# Allegro board QUADCOPTER1brd3_3.brd
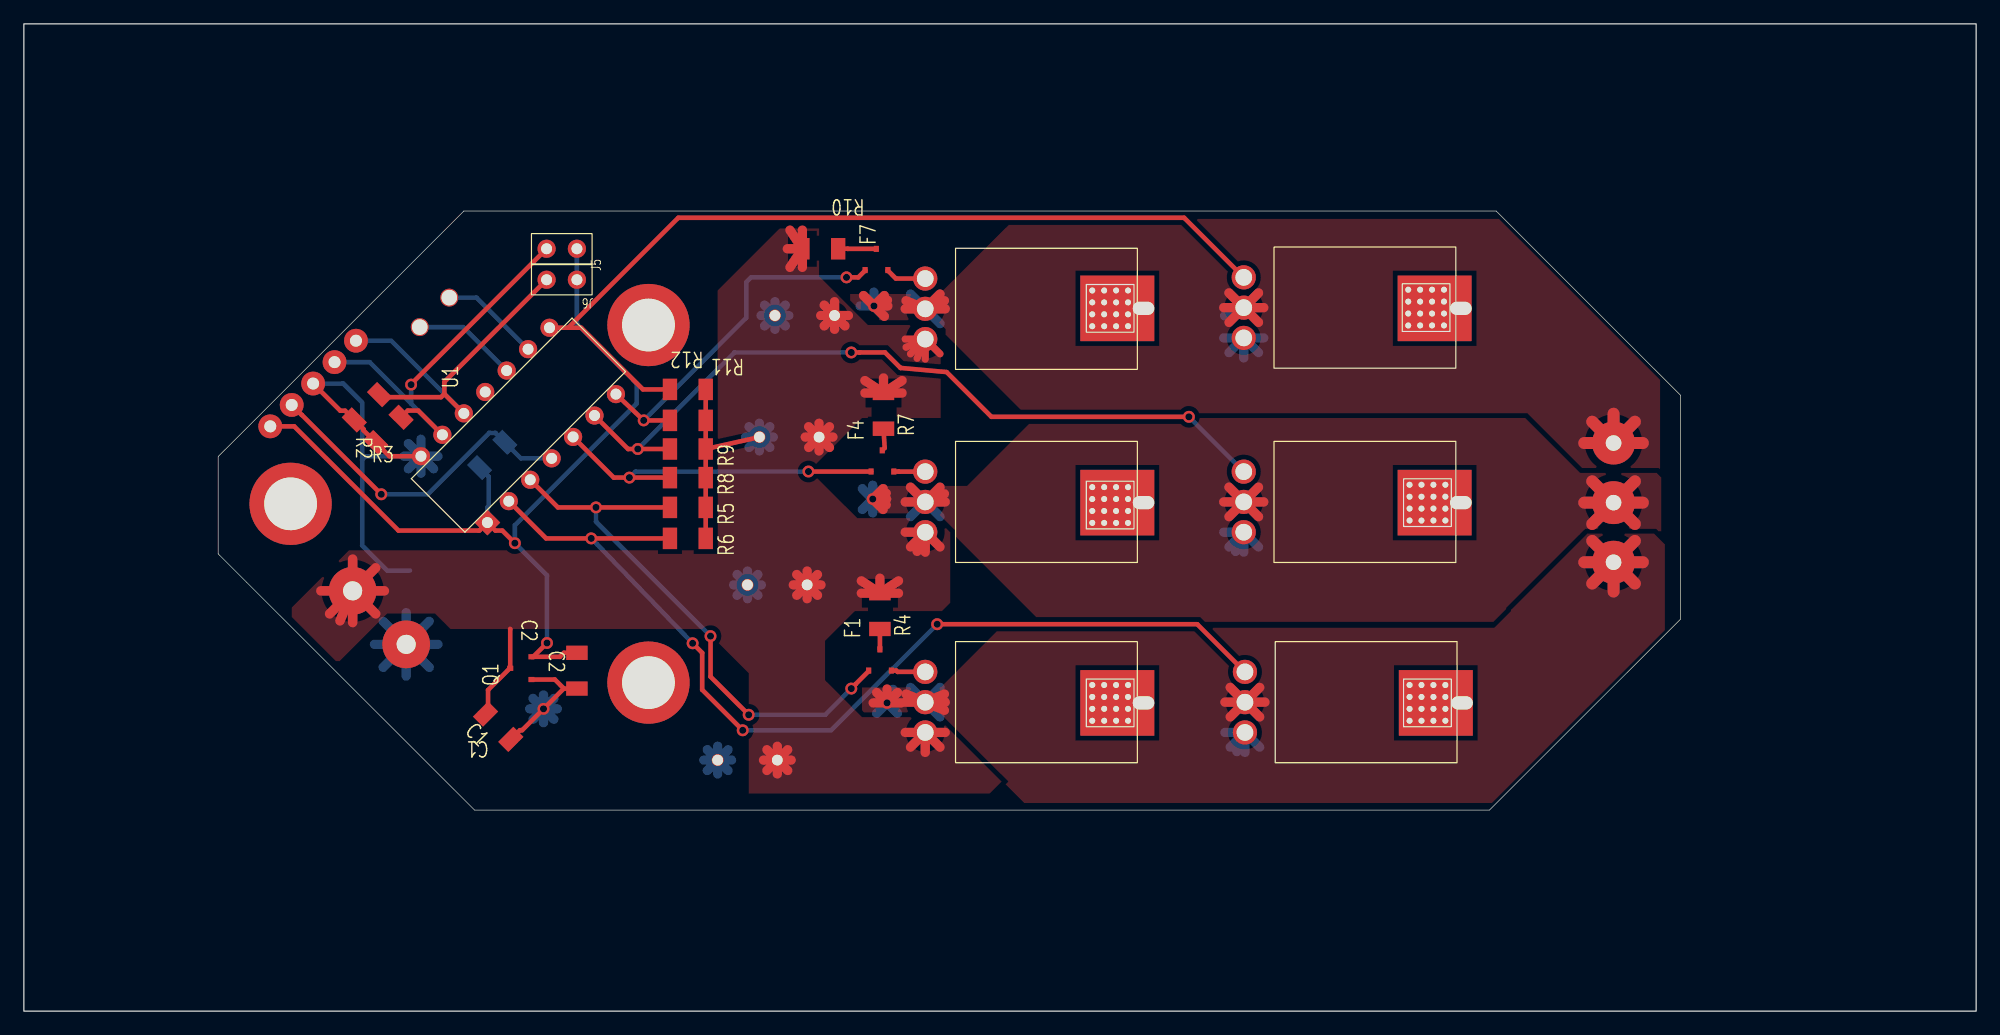
[diagram p0: board, top side]
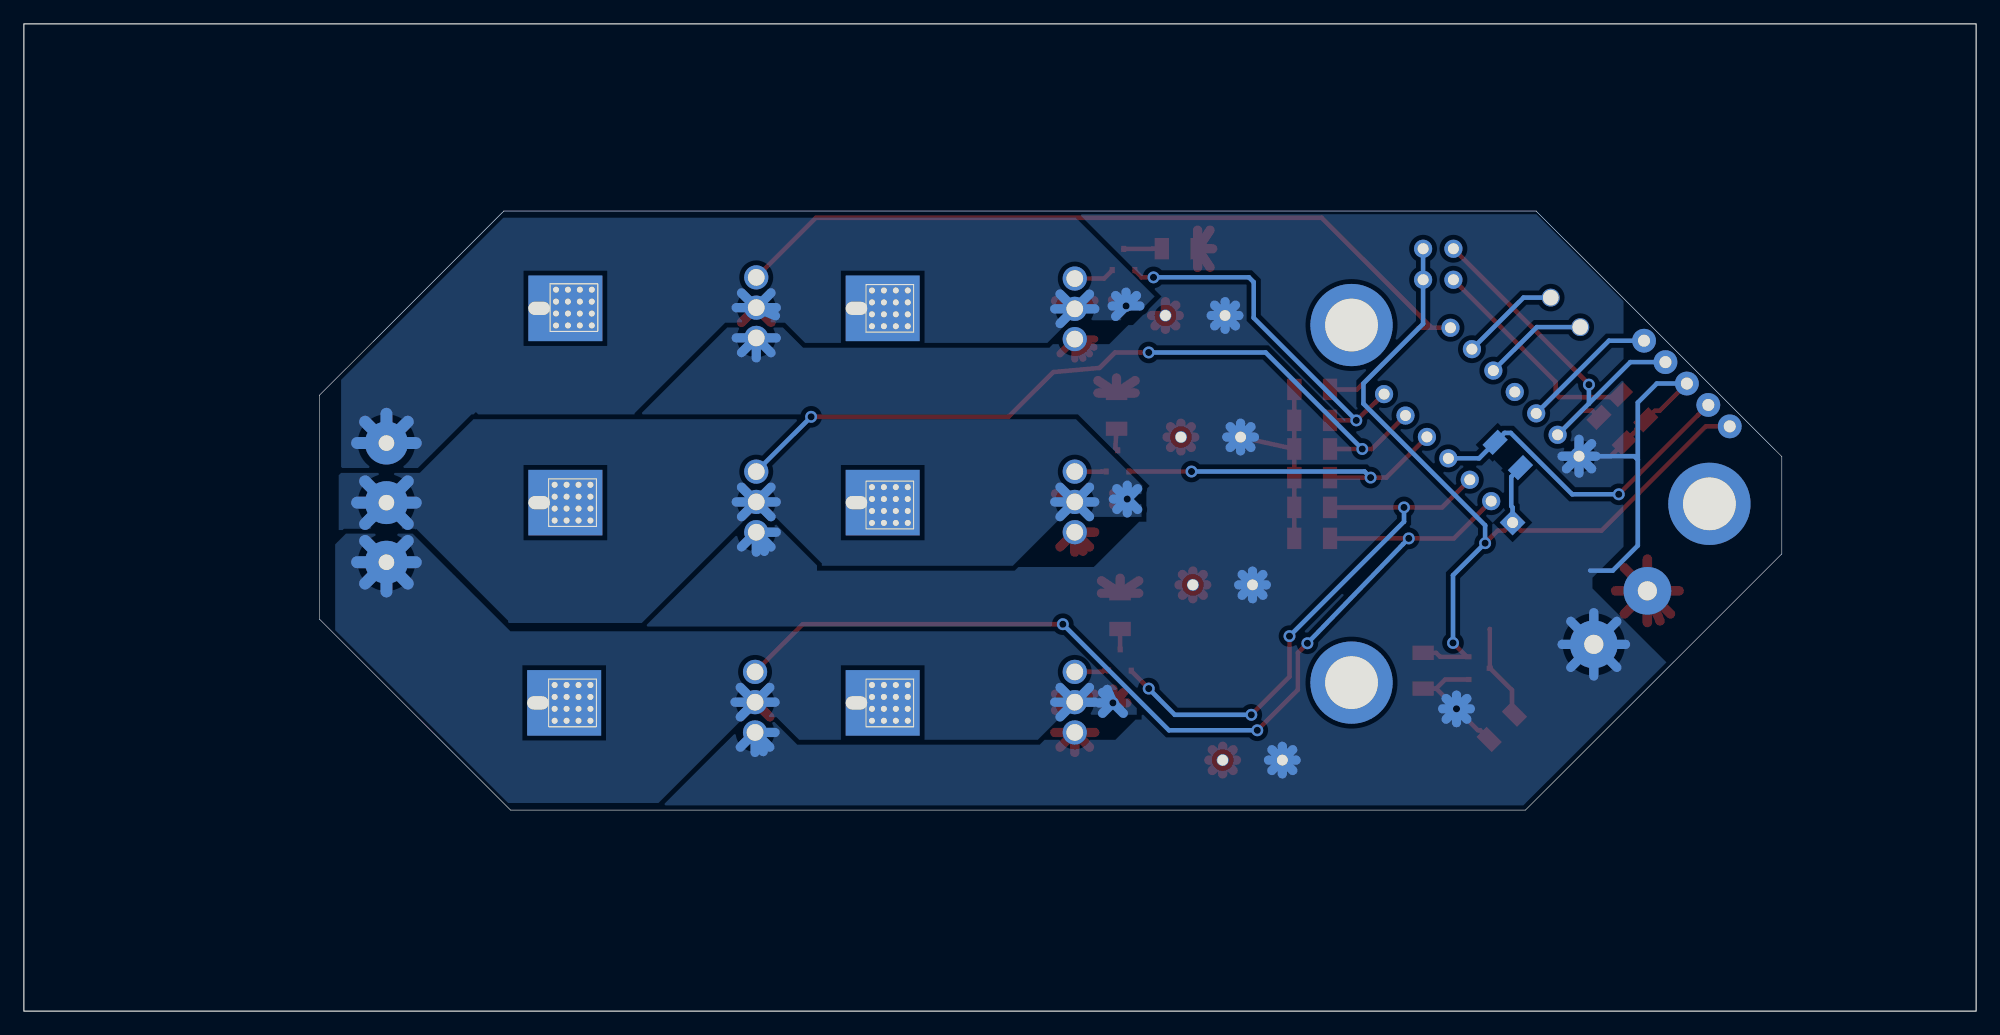
[diagram p1: board, bottom side, seen from below]

Outline 163.65 x 82.83 mm; copper layers: TOP, BOTTOM. Coordinates in mm from the lower left corner of the outline.
Outline path: rectangle 0,0 163.65,82.83 ; 16.29,46.53 16.29,38.36 37.78,16.87 122.86,16.87 138.86,32.88 138.86,51.68 123.42,67.13 36.89,67.13 16.29,46.53

## Placement (name value [footprint] x y rotation side)
C1  1uF  [SMD_CAP_1206]  39.76 23.86 315 top
C2  1uF  [SMD_CAP_1206]  46.36 28.56 270 top
C3  100uF  [CAP250]  66.16 24.06 180 top
C4  100uF  [CAP250]  68.66 38.76 180 top
C5  100uF  [CAP250]  70.96 61.36 180 top
C6  100uF  [CAP250]  69.66 51.16 180 top
F1  2N7002  [SOT23]  71.76 29.46 90 top
F2  IRF9Z34N  [TO220-3]  75.56 28.46 180 top
F3  IRFZ34N  [TO220-3]  102.36 28.46 180 top
F4  2N7002  [SOT23]  71.96 46.16 90 top
F5  IRF9Z34N  [TO220-3]  75.56 45.26 180 top
F6  IRFZ34N  [TO220-3]  102.26 45.26 180 top
F7  2N7002  [SOT23]  71.46 63.06 90 top
F8  IRF9Z34N  [TO220-3]  75.56 61.46 180 top
F9  IRFZ34N  [TO220-3]  102.26 61.56 180 top
J1  CON2  [KDCONN2]  27.56 35.26 315 top
J2  CON2  [KDCONN2_2]  35.66 59.86 225 top
J4  CON5  [CONN5]  18.86 49.06 315 top
J5  JUMPER  [JUMPER2]  46.36 63.96 180 top
J6  JUMPER  [JUMPER2]  46.36 61.36 180 top
J7  CON3  [ED1362]  135.76 35.16 90 top
NOREF  -  [unnamed]  111.05 52.53 0 top
NOREF#2  -  [unnamed]  84.56 52.46 0 top
NOREF#3  -  [unnamed]  111.16 36.16 0 top
NOREF#4  -  [unnamed]  84.56 19.36 0 top
NOREF#5  -  [unnamed#2]  97.86 19.46 180 top
NOREF#6  -  [unnamed#2]  97.86 36.26 180 top
NOREF#7  -  [unnamed#3]  22.36 42.56 0 top
NOREF#8  -  [unnamed]  111.16 19.36 0 top
NOREF#9  -  [unnamed#3]  52.36 57.56 0 top
NOREF#10  -  [unnamed#2]  124.46 52.56 180 top
NOREF#11  -  [unnamed#2]  124.56 19.46 180 top
NOREF#12  -  [unnamed#3]  52.36 27.56 0 top
NOREF#13  -  [unnamed#2]  97.86 52.56 180 top
NOREF#14  -  [unnamed]  84.56 35.96 0 top
NOREF#15  -  [unnamed#2]  124.46 36.26 180 top
Q1  Diodes_AP1117T50L-U  [SOT23]  41.66 28.76 180 top
R1  10k  [SMD_RES_1206]  39.26 46.66 225 bottom
R2  10k  [SMD_RES_1206]  28.76 50.66 45 top
R3  10k  [SMD_RES_1206]  30.56 48.76 45 top
R4  10k  [SMD_RES_1206]  71.76 33.56 90 top
R5  10k  [SMD_RES_1206]  55.66 42.26 180 top
R6  10k  [SMD_RES_1206]  55.66 39.66 180 top
R7  10k  [SMD_RES_1206]  72.06 50.36 90 top
R8  10k  [SMD_RES_1206]  55.66 44.76 180 top
R9  10k  [SMD_RES_1206]  55.66 47.16 180 top
R10  10k  [SMD_RES_1206]  66.76 63.96 180 top
R11  10k  [SMD_RES_1206]  55.66 49.56 180 top
R12  10k  [SMD_RES_1206]  55.66 52.16 180 top
U1  PIC16F1503  [PIC16FL1503]  41.46 49.16 135 top

## Library data of the parts
C1-C6 = CAP
F1 F4 F7 = 2N7002_1
F2 F5 F8 = IRF9Z34N_2
F3 F6 F9 = IRFZ34N
J1 J2 = CON2
J4 = CON5
J5 J6 = JUMPER: User Part Number: ***
J7 = CON3
Q1 = Diodes_AP1117T50L-U_1
R1-R12 = R
U1 = PIC16LF1503_4

## Footprints (pads in the part's own frame, mm; a bottom-side part is the same pattern mirrored in y, then rotated)
CAP250
  round 1 hole 0.9: 1(3,3) 2(8,3)
CONN5
  round 2 hole 1: 1(1.27,11.43) 2(1.27,8.89) 3(1.27,6.35) 4(1.27,3.81) 5(1.27,1.27)
ED1362
  round 3.6 hole 1.3: 1(2.5,2.5) 2(7.5,2.5) 3(12.5,2.5)
JUMPER2
  round 1.524 hole 0.914: 1(0,0) 2(2.54,0)
KDCONN2
  round 4 hole 1.6: 1(0,0) 2(6.35,0)
KDCONN2_2
  round 1.5 hole 1.3: 1(0,0) 2(3.5,0)
PIC16FL1503
  rect 1.524x1.524 hole 0.914: 1(-3.937,7.62)
  round 1.524 hole 0.914: 2(-3.937,5.08) 3(-3.937,2.54) 4(-3.937,0) 5(-3.937,-2.54) 6(-3.937,-5.08) 7(-3.937,-7.62) 8(3.937,-7.62) 9(3.937,-5.08) 10(3.937,-2.54) 11(3.937,0) 12(3.937,2.54) 13(3.937,5.08) 14(3.937,7.62)
SMD_CAP_1206
  rect 1.2x1.8 smd: 1(-1.5,0) 2(1.5,0)
SMD_RES_1206
  rect 1.2x1.8 smd: 1(-1.5,0) 2(1.5,0)
SOT23
  rect 0.508x0.432 smd: 1(-0.889,0.94) 2(-0.889,-0.965) 3(0.889,0)
TO220-3
  round 2.032 hole 1.397: 1(0,0) 2(0,2.54) 3(0,5.08)
unnamed
  round 0.7 hole 0.5: (5,8) (5,7) (5,6) (5,5) (6,8) (6,7) (6,6) (6,5) (7,8) (7,7) (7,6) (7,5) (8,8) (8,7) (8,6) (8,5)
unnamed#2
  rect 6.2x5.5 hole 1.8x1.1: (4,-6.4)
unnamed#3
  round 6.9 hole 4.42: (0,0)

## Nets
12V: C1.1 C3.1 C4.1 C5.1 C6.1 F2.3(S) F5.3(S) F8.3(S) J1.1 Q1.3(VIN) R4.2 R7.2 R10.2
0: C1.2 C2.2 C3.2 C4.2 C5.2 C6.2 F3.3(S) F6.3(S) F9.3(S) J1.2 J4.3 Q1.1(GND) R2.1 R3.1 R5.1 R6.1 R8.1 R9.1 R11.1 R12.1 U1.14(VSS)
A: F2.2(D) F3.2(D) J7.1
ADDR0: J4.2 J5.2 R3.2 U1.13(ICSPDAT/ADDR0)
ADDR1: J4.1 J6.2 R2.2 U1.12(ICSPCLK/ADDR1)
AHIGH: F1.1(GATE) R5.2 U1.3(RA4)
ALOW: F3.1(G) R6.2 U1.2(RA5)
B: F5.2(D) F6.2(D) J7.2
BHIGH: F4.1(GATE) R8.2 U1.5(RC5)
BLOW: F6.1(G) R9.2 U1.6(RC4)
C: F8.2(D) F9.2(D) J7.3
CHIGH: F7.1(GATE) R11.2 U1.7(RC3)
CLOW: F9.1(G) R12.2 U1.8(RC2)
NMCLR: J4.4 R1.1 U1.4(NMCLR)
SCL: J2.2 U1.10(SCL)
SDA: J2.1 U1.9(SDA)
VEXT: C2.1 J4.5 J5.1 J6.1 Q1.2(VOUT) R1.2 U1.1(VDD)
N175255: F4.2(SOURCE) F5.1(G)
N175303: F4.3(DRAIN) R7.1
N175727: F7.2(SOURCE) F8.1(G)
N175775: F7.3(DRAIN) R10.1
N177443: F1.2(SOURCE) F2.1(G)
N1635110: F1.3(DRAIN) R4.1

Pads without a net: U1 11

## Via types
v1: diameter 1, hole 0.6, TOP to BOTTOM, 23 vias

## Routing (per net, layer and track width the routed paths; a pad name or vN(x,y) marks a point on that pad's centre or on a via; arc(x,y) is an arc through that point)
12V: length 118.4
  TOP w0.381: C1.1 38.91,25.14 38.91,26.94 40.73,28.76 Q1.3 40.77,32.05 40.76,32.06
  TOP w0.6: 73.89,56.38 F8.3 ; F8.3 75.56,54.71 ; F8.3 73.95,55.7 ; F8.3 74.88,54.78 ; F8.3 74.32,55.15 ; F8.3 76.8,55.15
  TOP w0.781: 70.2,36.1 R4.2 ; R4.2 70.2,35.06 ; R4.2 71.76,36.32 ; R4.2 73.32,35.06 ; R4.2 73.32,36.1 ; C4.1 65.66,36.92 ; C4.1 65.66,34.6 ; C4.1 64.79,34.89 ; C4.1 66.53,36.63 ; C4.1 66.53,34.89 ; C4.1 64.5,35.76 ; C4.1 64.79,36.63 ; C4.1 66.82,35.76 ; 64,63.96 R10.2 ; R10.2 64.22,62.4 ; R10.2 64.22,65.52 ; R10.2 65.26,65.52 ; R10.2 65.26,62.4 ; C6.1 66.66,49.32 ; C6.1 67.53,49.03 ; C6.1 67.82,48.16 ; C6.1 67.53,47.29 ; C6.1 66.66,47 ; C6.1 65.5,48.16 ; C6.1 65.79,47.29 ; C6.1 65.79,49.03 ; 67.09,59.23 C5.1 ; C5.1 67.09,57.49 ; C5.1 67.96,59.52 ; C5.1 69.12,58.36 ; C5.1 67.96,57.2 ; C5.1 68.83,57.49 ; C5.1 66.8,58.36 ; C3.1 64.03,20.19 ; C3.1 63.16,19.91 ; C3.1 62,21.06 ; C3.1 63.16,22.22 ; C3.1 64.32,21.06 ; C3.1 62.29,21.93 ; C3.1 64.03,21.93 ; C3.1 62.29,20.19 ; 75.56,21.71 F2.3 ; F2.3 73.89,23.38 ; F2.3 76.8,22.15 ; F2.3 74.32,22.15 ; F2.3 77.23,23.38 ; 73.89,40.18 F5.3 ; F5.3 74.88,38.58 ; F5.3 76.8,38.95 ; F5.3 74.32,38.95 ; F5.3 75.56,38.51 ; 70.5,52.9 R7.2 ; R7.2 73.62,51.86 ; R7.2 72.06,53.12 ; R7.2 73.62,52.9 ; R7.2 70.5,51.86
  TOP w0.8: J1.1 27.56,37.92 ; J1.1 29.49,37.2 ; J1.1 30.22,35.26 ; J1.1 27.56,32.6 ; J1.1 26.5,32.75 ; J1.1 29.49,33.33 ; J1.1 25.63,33.33 ; J1.1 24.9,35.26
0: length 169.6
  TOP w0.381: R9.1 R8.1 R5.1 R6.1 ; R9.1 R11.1 R12.1 ; R9.1 C6.2 ; J4.3 26.53,50.37 26.93,50.37 R2.1 28.47,48.83 28.47,48.73 R3.1 30.64,46.56 U1.14 ; C1.2 41.59,23.57 41.77,23.57 v1(43.56,25.36) 45.26,27.06 45.27,27.06 ; 45.27,27.06 44.51,27.82 Q1.1 ; 45.27,27.06 C2.2
  BOTTOM w0.381: J4.3 26.77,52.66 28.36,51.06 28.36,46.26 ; 28.36,46.26 28.36,39.06 30.46,36.96 32.36,36.96 ; 28.36,46.26 28.66,46.56 31.87,46.56
  BOTTOM w0.781: F6.3 103.5,38.95 ; F6.3 102.26,38.51 ; F6.3 101.02,38.95 ; F6.3 100.59,40.18 ; F6.3 101.58,38.58 ; 57.29,20.19 C3.2 ; C3.2 58.16,19.91 ; C3.2 59.32,21.06 ; C3.2 59.03,21.93 ; C3.2 57.29,21.93 ; C3.2 57,21.06 ; C3.2 59.03,20.19 ; C3.2 58.16,22.22 ; 42.69,26.23 v1(43.56,25.36) ; v1(43.56,25.36) 42.4,25.36 ; v1(43.56,25.36) 43.56,24.2 ; v1(43.56,25.36) 44.72,25.36 ; v1(43.56,25.36) 42.69,24.49 ; v1(43.56,25.36) 43.56,26.52 ; v1(43.56,25.36) 44.43,26.23 ; v1(43.56,25.36) 44.43,24.49 ; 60.79,49.03 C6.2 ; C6.2 62.53,47.29 ; C6.2 62.53,49.03 ; C6.2 60.5,48.16 ; C6.2 61.66,49.32 ; C6.2 62.82,48.16 ; C6.2 61.66,47 ; C6.2 60.79,47.29 ; U1.14 34.71,46.56 ; U1.14 32.23,47.62 ; U1.14 34.34,45.5 ; U1.14 33.29,45.14 ; U1.14 33.29,47.98 ; U1.14 32.23,45.5 ; U1.14 31.87,46.56 ; 100.69,23.38 F3.3 ; F3.3 101.12,22.15 ; F3.3 103.6,22.15 ; F3.3 101.68,21.78 ; F3.3 102.36,21.71 ; J1.2 32.05,33.43 ; J1.2 34.71,30.77 ; J1.2 30.12,32.71 ; J1.2 30.12,28.84 ; J1.2 32.05,28.11 ; J1.2 33.98,32.71 ; J1.2 29.39,30.77 ; J1.2 33.98,28.84 ; C4.2 61.53,34.89 ; C4.2 60.66,34.6 ; C4.2 59.5,35.76 ; C4.2 61.53,36.63 ; C4.2 60.66,36.92 ; C4.2 59.79,36.63 ; C4.2 61.82,35.76 ; C4.2 59.79,34.89 ; 62.09,57.49 C5.2 ; C5.2 62.09,59.23 ; C5.2 64.12,58.36 ; C5.2 63.83,59.23 ; C5.2 62.96,57.2 ; C5.2 62.96,59.52 ; C5.2 61.8,58.36 ; C5.2 63.83,57.49 ; 101.02,55.25 F9.3 ; F9.3 100.59,56.48 ; F9.3 103.94,56.48 ; F9.3 102.26,54.81 ; F9.3 103.5,55.25
A: length 83.1
  TOP w0.781: 71.2,25.86 v1(72.36,25.86) ; v1(72.36,25.86) 71.49,26.73 ; v1(72.36,25.86) 72.36,27.02 ; v1(72.36,25.86) 73.52,25.86 ; v1(72.36,25.86) 73.23,26.73 ; F3.2 104.03,25.92 ; F3.2 101.12,27.16 ; F3.2 103.6,24.69 ; F3.2 100.69,25.92 ; F3.2 101.12,24.69 ; F3.2 103.6,27.16 ; F2.2 77.17,26.61 ; F2.2 73.89,25.92 ; F2.2 77.17,25.24 ; F2.2 73.95,26.61 ; F2.2 77.23,25.92
  TOP w1: J7.1 135.72,37.66 ; J7.1 133.26,35.2 ; J7.1 135.05,35.87 ; J7.1 135.05,39.45 ; J7.1 131.47,39.45 ; J7.1 130.8,37.66 ; J7.1 131.47,35.87
  BOTTOM w0.781: F2.2 76.8,27.16 ; F2.2 76.8,24.69 ; F2.2 73.89,25.92 ; F2.2 74.32,27.16 ; F2.2 77.23,25.92 ; 71.49,24.99 v1(72.36,25.86) ; v1(72.36,25.86) 73.23,26.73 ; v1(72.36,25.86) 73.52,25.86 ; v1(72.36,25.86) 72.85,27 ; v1(72.36,25.86) 73.23,24.99 ; F3.2 104.03,25.92 ; F3.2 100.69,25.92 ; F3.2 103.6,27.16 ; F3.2 101.12,27.16 ; F3.2 103.6,24.69
  BOTTOM w1: 133.26,35.2 J7.1 ; J7.1 135.05,35.87 ; J7.1 130.8,37.66 ; J7.1 131.47,39.45 ; J7.1 131.47,35.87 ; J7.1 135.72,37.66 ; J7.1 135.05,39.45
ADDR0: length 33.8
  TOP w0.381: v1(32.46,52.56) 32.46,52.6 J5.2 ; R3.2 32.18,50.38 33.06,50.38 U1.13
  BOTTOM w0.381: 32.46,50.98 28.99,54.45 J4.2 ; 32.46,50.98 U1.13 ; 32.46,50.98 v1(32.46,52.56)
ADDR1: length 32.6
  TOP w0.381: 35.25,51.78 U1.12 ; 35.25,51.78 35.25,52.79 J6.2 ; 35.25,51.78 34.98,51.51 30.03,51.51 R2.2
  BOTTOM w0.381: U1.12 30.78,56.25 J4.1
AHIGH: length 47
  TOP w0.381: R5.2 v1(47.96,42.26) 44.77,42.26 U1.3 ; v1(60.76,24.86) 57.56,28.06 v1(57.56,31.46) ; v1(69.36,27.06) 69.71,27.41 69.71,27.42 70.82,28.54 F1.1
  BOTTOM w0.381: v1(69.36,27.06) 67.18,24.86 v1(60.76,24.86) ; v1(57.56,31.46) 47.96,41.06 v1(47.96,42.26)
ALOW: length 83.5
  TOP w0.381: F3.1 98.36,32.46 v1(76.56,32.46) ; U1.2 43.78,39.66 v1(47.56,39.66) R6.2 ; v1(60.26,23.56) 56.86,26.96 56.86,30.06 v1(56.06,30.86)
  BOTTOM w0.381: v1(60.26,23.56) 67.66,23.56 v1(76.56,32.46) ; v1(47.56,39.66) 48.05,39.18 v1(56.06,30.86)
B: length 84.2
  TOP w0.781: F5.2 77.17,43.41 ; F5.2 76.8,43.96 ; F5.2 74.32,43.96 ; F5.2 73.89,42.72 ; F5.2 77.23,42.72 ; v1(71.16,42.96) 72.03,43.83 ; v1(71.16,42.96) 72.29,43.45 ; v1(71.16,42.96) 72.03,42.09 ; v1(71.16,42.96) 72.32,42.96 ; v1(71.16,42.96) 72.29,42.48 ; 100.59,42.72 F6.2 ; F6.2 103.5,41.49 ; F6.2 101.02,41.49 ; F6.2 101.02,43.96 ; F6.2 103.5,43.96 ; F6.2 103.94,42.72
  TOP w1: 130.8,42.66 J7.2 ; J7.2 131.47,40.87 ; J7.2 131.47,44.45 ; J7.2 135.05,40.87 ; J7.2 135.72,42.66 ; J7.2 135.05,44.45
  BOTTOM w0.781: 73.89,42.72 F5.2 ; F5.2 76.8,41.49 ; F5.2 74.32,41.49 ; F5.2 77.23,42.72 ; F5.2 76.8,43.96 ; F5.2 74.32,43.96 ; 101.02,41.49 F6.2 ; F6.2 103.94,42.72 ; F6.2 103.5,43.96 ; F6.2 103.5,41.49 ; F6.2 100.59,42.72 ; F6.2 101.02,43.96 ; v1(71.16,42.96) 71.16,44.12 ; v1(71.16,42.96) 70.29,42.09 ; v1(71.16,42.96) 72.03,43.83 ; v1(71.16,42.96) 70.29,43.83 ; v1(71.16,42.96) 72.03,42.09 ; v1(71.16,42.96) 71.16,41.8 ; v1(71.16,42.96) 72.32,42.96
  BOTTOM w1: J7.2 135.05,44.45 ; J7.2 135.72,42.66 ; J7.2 131.47,44.45 ; J7.2 135.05,40.87 ; J7.2 130.8,42.66 ; J7.2 131.47,40.87
BHIGH: length 30
  TOP w0.381: R8.2 v1(50.76,44.76) 49.45,44.76 U1.5 ; F4.1 v1(65.77,45.27)
  BOTTOM w0.381: v1(65.77,45.27) 51.27,45.27 v1(50.76,44.76)
BLOW: length 65.7
  TOP w0.381: U1.6 50.64,47.16 v1(51.46,47.16) R9.2 ; v1(69.36,55.26) 70.05,55.26 70.06,55.27 72.18,55.27 73.48,53.96 73.52,53.96 77.36,53.62 81.11,49.86 97.66,49.86 v1(97.66,49.86)
  BOTTOM w0.381: v1(69.36,55.26) 59.56,55.26 v1(51.46,47.16) ; F6.1 v1(97.66,49.86)
C: length 74.2
  TOP w0.781: 73.89,58.92 F8.2 ; F8.2 77.23,58.92 ; F8.2 77.17,59.61 ; F8.2 76.8,60.16 ; F8.2 73.95,59.61 ; v1(71.26,59.16) 72.39,59.65 ; v1(71.26,59.16) 72.42,59.16 ; v1(71.26,59.16) 72.13,58.29 ; v1(71.26,59.16) 72.13,60.03 ; v1(71.26,59.16) 70.39,60.03 ; 101.02,57.79 F9.2 ; F9.2 101.02,60.26 ; F9.2 100.59,59.02 ; F9.2 103.5,60.26 ; F9.2 103.5,57.79 ; F9.2 103.94,59.02
  TOP w1: J7.3 133.26,50.12 ; J7.3 135.72,47.66 ; J7.3 131.47,49.45 ; J7.3 130.8,47.66 ; J7.3 135.05,49.45
  BOTTOM w0.781: F8.2 76.8,57.69 ; F8.2 77.23,58.92 ; F8.2 76.8,60.16 ; F8.2 73.89,58.92 ; F8.2 74.32,60.16 ; 100.65,58.34 F9.2 ; F9.2 103.5,60.26 ; F9.2 100.59,59.02 ; F9.2 101.02,60.26 ; F9.2 103.94,59.02 ; v1(71.26,59.16) 72.42,59.16 ; v1(71.26,59.16) 71.26,60.32 ; v1(71.26,59.16) 70.1,59.16 ; v1(71.26,59.16) 70.39,60.03 ; v1(71.26,59.16) 72.13,60.03 ; v1(71.26,59.16) 72.13,58.29
  BOTTOM w1: J7.3 135.72,47.66 ; J7.3 133.26,50.12 ; J7.3 131.47,49.45 ; J7.3 130.8,47.66 ; J7.3 135.05,49.45
CHIGH: length 31
  TOP w0.381: F7.1 70.52,62.14 69.95,61.56 v1(68.96,61.56) ; U1.7 v1(51.96,49.56) R11.2
  BOTTOM w0.381: v1(51.96,49.56) 60.56,58.16 60.56,61.16 60.96,61.56 v1(68.96,61.56)
CLOW: length 74.8
  TOP w0.381: 45.63,57.34 54.86,66.56 97.26,66.56 F9.1 ; 45.63,57.34 U1.8 ; 45.63,57.34 46.73,57.34 51.9,52.16 R12.2
NMCLR: length 27.9
  TOP w0.381: J4.4 23.29,50.02 23.31,50.02 v1(29.96,43.36)
  BOTTOM w0.381: U1.4 41.67,46.38 R1.1 39.53,48.51 39.01,48.51 33.86,43.36 v1(29.96,43.36)
SCL: length 8.8
  BOTTOM w0.381: J2.2 36.83,57.39 U1.10
SDA: length 8.4
  BOTTOM w0.381: J2.1 37.94,59.86 U1.9
VEXT: length 76.2
  TOP w0.381: v1(43.85,30.89) 42.69,29.73 ; 42.69,29.73 44.93,29.73 45.27,30.06 C2.1 ; 42.69,29.73 Q1.2 ; v1(41.16,39.26) 40.11,40.32 39.53,40.32 U1.1 38.18,40.32 31.41,40.32 22.66,49.06 J4.5
  BOTTOM w0.381: U1.1 38.86,42.26 38.97,42.38 38.97,44.83 R1.2 ; v1(43.85,30.89) 43.85,36.57 v1(41.16,39.26) 41.16,40.76 51.36,50.96 51.36,52.66 46.36,57.66 J6.1 J5.1
N175255: length 2.6
  TOP w0.381: F5.1 73.34,45.26 73.33,45.27 F4.2
N175303: length 1.9
  TOP w0.381: R7.1 72.16,47.25 F4.3
N175727: length 3.5
  TOP w0.381: F8.1 73.1,61.46 72.43,62.14 F7.2
N175775: length 3.2
  TOP w0.381: R10.1 69.05,63.96 69.06,63.95 71.46,63.95
N177443: length 2.9
  TOP w0.381: F2.1 73.24,28.46 73.13,28.58 F1.2
N1635110: length 1.7
  TOP w0.381: F1.3 R4.1

## Copper pours and planes (outline as drawn; the poured copper is in the pictures)
12V on TOP: 76.56,24.66 70.26,24.66 67.16,27.76 67.16,31.06 69.66,33.56 76.96,33.56 77.66,34.26 77.66,40.16 76.46,41.36 69.86,41.36 65.86,45.36 70.26,49.76 76.86,49.76 76.86,57.06 76.36,57.56 70.76,57.56 66.66,61.66 66.66,65.66 63.36,65.66 58.16,60.46 58.16,40.06 56.76,38.66 27.26,38.66 22.46,33.86 22.46,33.06 26.16,29.36 26.46,29.36 30.46,33.36 34.46,33.36 35.76,32.06 57.06,32.06 60.76,28.36 60.76,18.26 80.96,18.26 81.96,19.26
0 on BOTTOM: 110.36,17.26 110.36,17.56 103.26,24.66 100.66,24.66 98.76,22.76 72.16,22.76 70.16,24.76 70.16,25.46 76.76,32.06 111.76,32.06 111.76,32.66 103.06,41.36 100.66,41.36 96.86,37.56 96.86,37.36 96.76,37.26 73.96,37.26 69.76,41.46 69.76,44.26 75.36,49.86 112.46,49.86 104.56,57.76 100.06,57.76 98.26,55.96 72.66,55.96 68.56,60.06 68.56,60.16 75.26,66.86 36.86,66.86 29.56,59.56 29.56,38.96 32.16,36.36 32.16,35.46 25.96,29.26 37.96,17.26
A on TOP: 70.26,24.76 76.56,24.76 83.86,17.46 123.06,17.46 137.56,31.96 137.56,39.16 136.66,40.06 131.06,40.06 124.66,33.66 124.66,33.56 123.26,32.16 81.86,32.16 76.86,27.16 70.26,27.16
A on BOTTOM: 70.36,24.86 70.36,25.56 76.66,31.86 122.86,31.86 131.06,40.06 136.66,40.06 137.56,39.16 137.56,31.96 123.06,17.46 110.46,17.46 103.26,24.66 100.56,24.66 98.66,22.76 78.66,22.76 76.56,24.86
B on TOP: 69.96,41.46 76.46,41.46 85.26,32.66 123.36,32.66 130.96,40.26 137.26,40.26 137.26,44.76 136.86,45.16 130.46,45.16 125.86,49.76 84.76,49.76 79.06,44.06 69.96,44.06
B on BOTTOM: 69.96,41.46 69.96,43.96 69.86,44.06 75.46,49.66 125.96,49.66 130.46,45.16 137.06,45.16 137.26,44.96 137.26,40.36 130.86,40.36 130.76,40.46 123.06,32.76 123.06,32.56 111.86,32.56 102.96,41.46 100.66,41.46 96.76,37.56 96.76,37.36 80.76,37.36 76.66,41.46
C on TOP: 130.66,45.26 130.46,45.26 125.76,49.96 84.06,49.96 76.36,57.66 70.86,57.66 69.26,59.26 69.26,60.16 76.16,60.16 76.26,60.06 76.66,60.06 83.06,66.46 123.66,66.46 137.16,52.96 137.16,45.16 130.76,45.16
C on BOTTOM: 70.86,57.96 75.96,57.96 77.86,56.06 98.16,56.06 99.86,57.76 104.86,57.76 112.46,50.16 112.46,50.06 125.56,50.06 125.76,50.26 130.56,45.46 136.86,45.46 137.06,45.66 137.06,52.96 123.46,66.56 75.46,66.56 68.86,59.96
